# Altium PCB 2018_CARTE_SENSORS5.PCBDOC
Units mil, origin at the board's own origin, x right, y up, seen from the top; angles counter-clockwise.
Board outline 4810 x 1181.1 mil, 4 copper layers (1-TOP, 2-GND, 3-SIGNAL, 4-BOTTOM); 63 components, 65 nets, 229 pads, 60 vias.
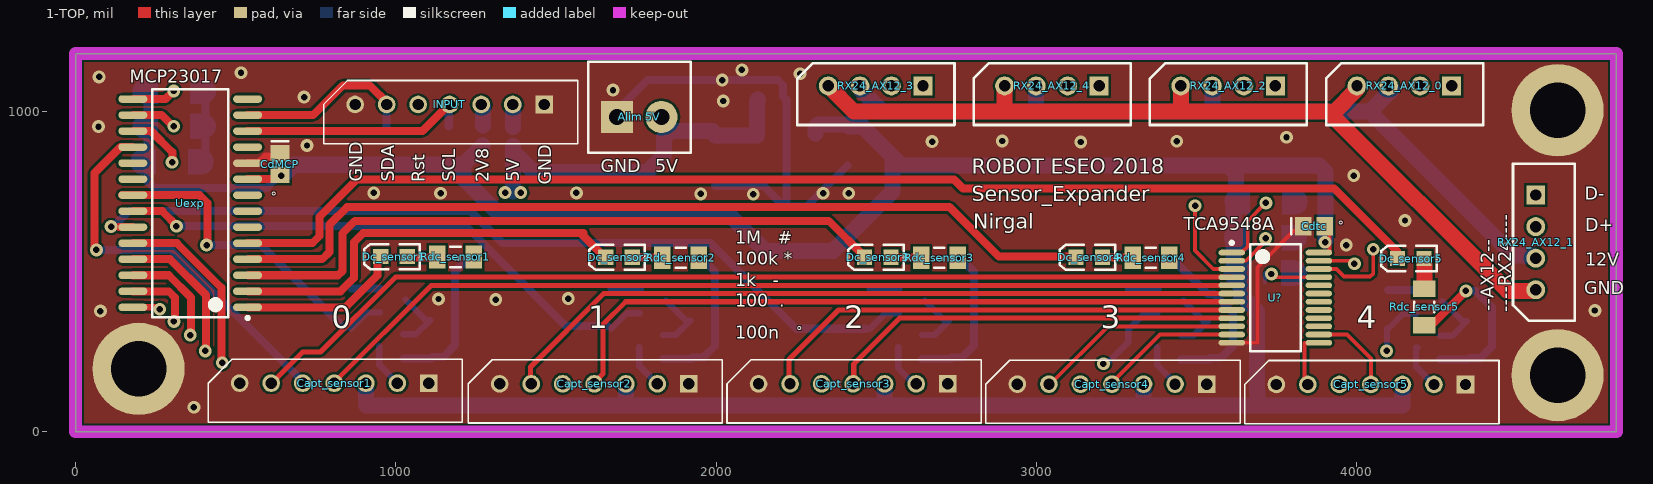
[diagram p0: 1-TOP view]
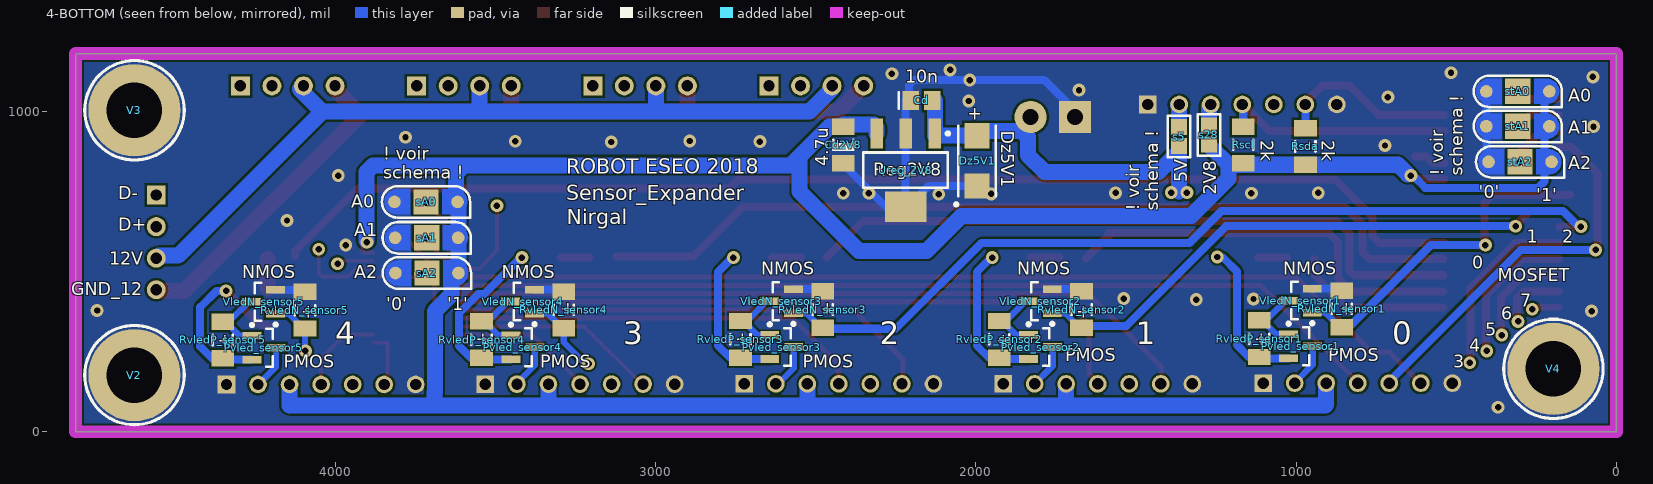
[diagram p1: 4-BOTTOM view, seen from below]
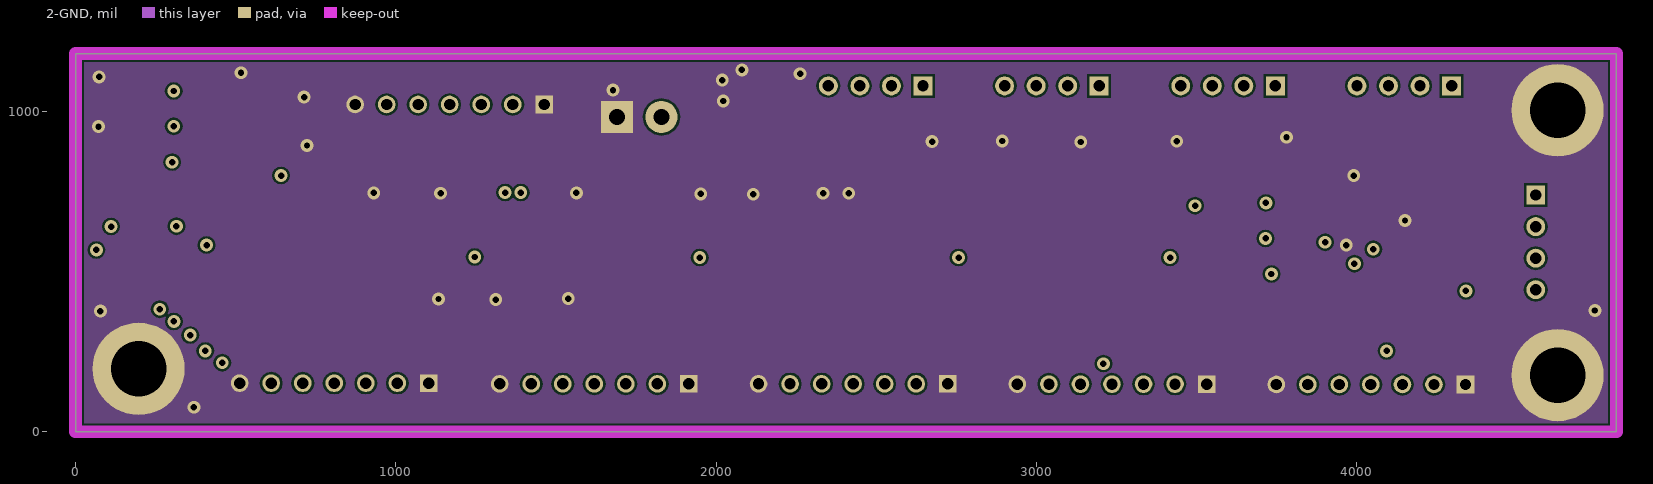
[diagram p2: 2-GND]
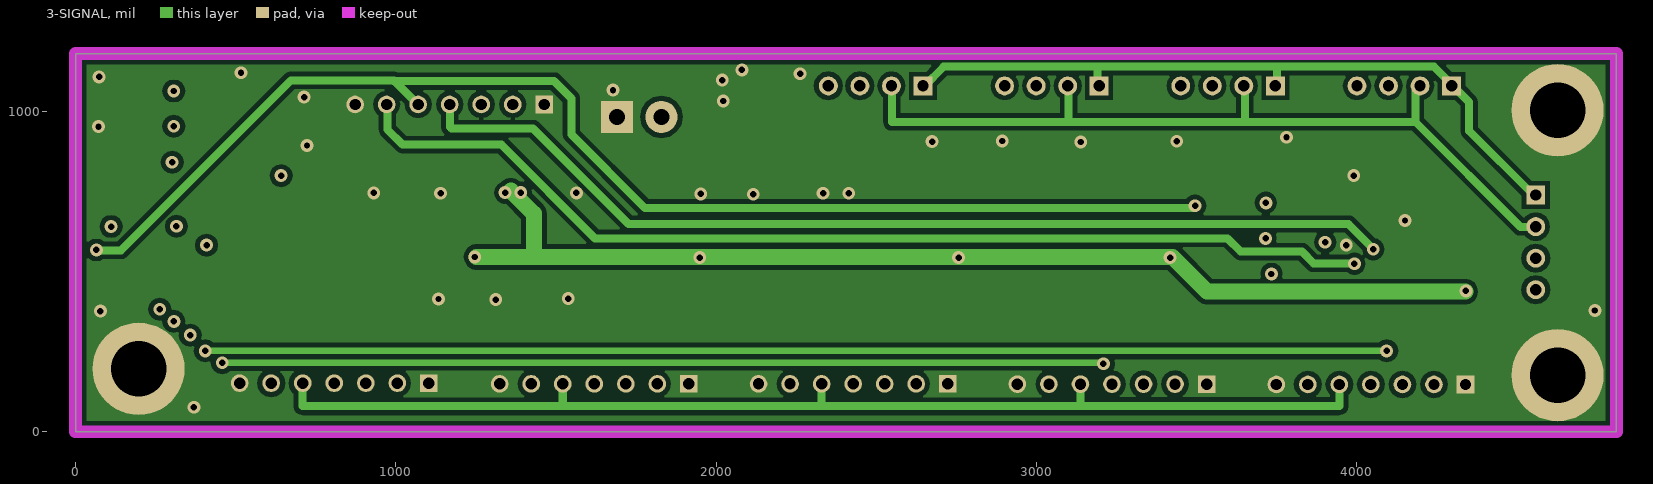
[diagram p3: 3-SIGNAL]
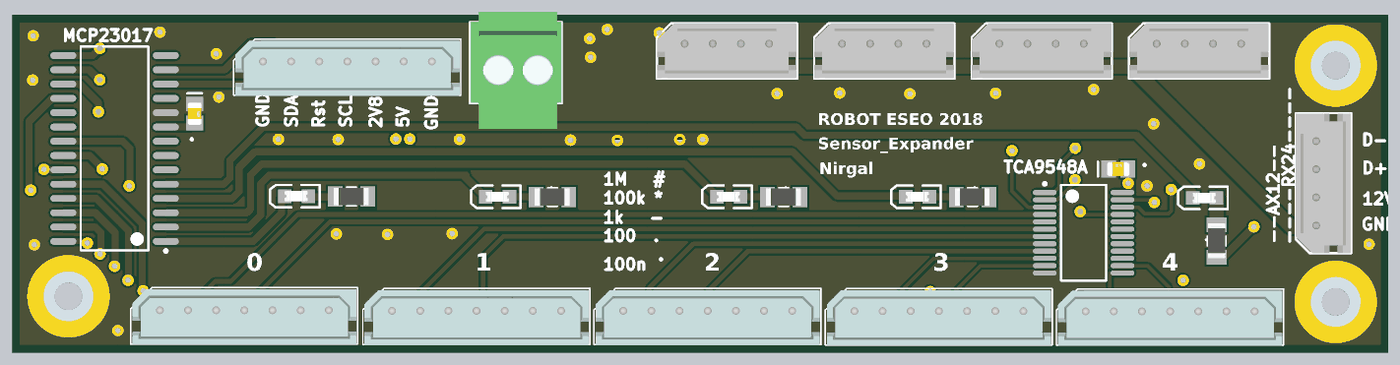
[diagram p4: 3D render of the assembled board from above, using the file's embedded part models]
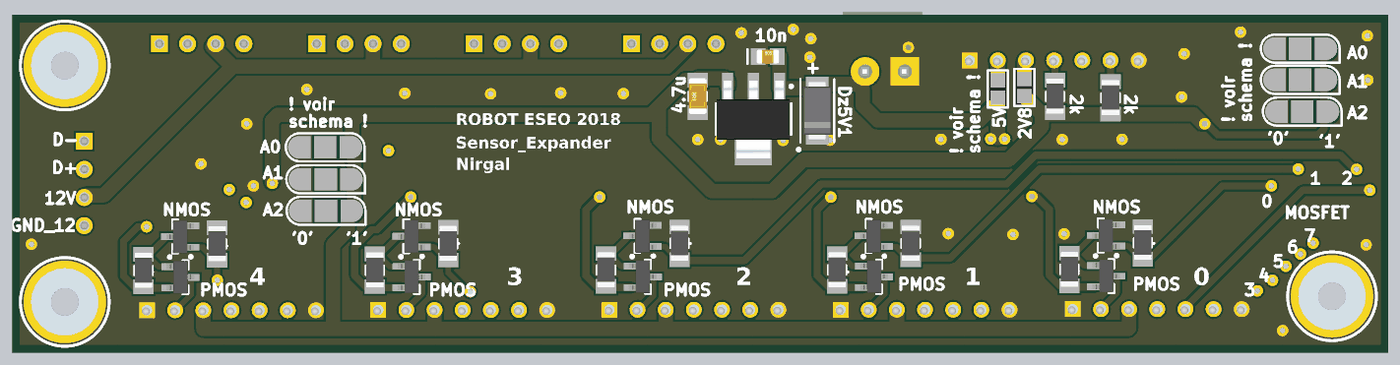
[diagram p5: 3D render of the assembled board from below, using the file's embedded part models]

## Layer stack, top to bottom
Top Solder: solder mask 0.4, Solder Resist, Dk 3.5
1-TOP: signal copper 1.4
Dielectric1: prepreg 12.6, FR-4, Dk 4.8
2-GND: signal copper 1.4
Dielectric2: core 12.6, FR-4, Dk 4.8
3-SIGNAL: signal copper 1.4
Dielectric3: prepreg 12.6, FR-4, Dk 4.8
4-BOTTOM: signal copper 1.4
Bottom Solder: solder mask 0.4, Solder Resist, Dk 3.5

## Board outline
0,0 0,1181.1 4810,1181.1 4810,0

## Design rules (kind name [scope] priority, off if disabled: settings)
Clearance Clearance_1 [InNamedPolygon('4-BOTTOM') Or  InNamedPolygon('2-SIGNAL') Or  InNamedPolygon('2-24V') Or  InNamedPolygon('3-TOP') Or  InNamedPolygon('3-GND')] p1: gap=15
Clearance [All] p2: gap=7
FabricationTestPointUsage TestPointUsage [All] p1: valid=0 allowmultiple=FALSE
FabricationTestpoint Testpoint [All] p1: side=3 testpointundercomponent=TRUE minsize=40 maxsize=100 preferedsize=60 minholesize=0 maxholesize=40 preferedholesize=32 testpointgrid=1 allowsidetop=TRUE allowsidebottom=TRUE usegrid=TRUE gridtolerance=0.01
PlaneClearance [All] p1: clearance=10
PlaneConnect [All] p1: planeconnectstyle=Direct reliefexpansion=25 reliefentries=4 reliefconductorwidth=12 reliefairgap=15
PolygonConnect [All] p1: connectstyle=Direct reliefconductorwidth=10 reliefentries=4 polygonreliefangle="90 Angle" airgapwidth=10
RoomDefinition 2018_CARTE_SENSORS5 [InComponentClass('2018_CARTE_SENSORS5')] p1: confinementstyle=ConfineIn formatcopy=TRUE lockcomponents=FALSE outline 3720,-880 3720,-840 3480,-840 3480,-880
RoomDefinition sensor5 [InComponentClass('sensor5')] p2: confinementstyle=ConfineIn formatcopy=TRUE lockcomponents=FALSE outline 3642.76,593 3642.76,20 4448.76,20 4448.76,593
RoomDefinition sensor4 [InComponentClass('sensor4')] p3: confinementstyle=ConfineIn formatcopy=TRUE lockcomponents=FALSE outline 2834.61,594 2834.61,21 3640.61,21 3640.61,594
RoomDefinition sensor3 [InComponentClass('sensor3')] p4: confinementstyle=ConfineIn formatcopy=TRUE lockcomponents=FALSE outline 2026.61,595 2026.61,22 2832.61,22 2832.61,595
RoomDefinition sensor2 [InComponentClass('sensor2')] p5: confinementstyle=ConfineIn formatcopy=TRUE lockcomponents=FALSE outline 1218.61,595 1218.61,22 2024.61,22 2024.61,595
RoomDefinition sensor1 [InComponentClass('sensor1')] p6: confinementstyle=ConfineIn formatcopy=TRUE lockcomponents=FALSE outline 407,597 407,24 1213,24 1213,597
RoutingLayers RoutingLayers_1 [All] p1: top layer_v5=TRUE mid layer 1_v5=FALSE mid layer 2_v5=FALSE bottom layer_v5=TRUE
RoutingLayers [All] p2: top layer_v5=TRUE mid layer 1_v5=FALSE mid layer 2_v5=FALSE bottom layer_v5=TRUE
RoutingVias [All] p1: holewidth=28 width=50 viastyle="Through Hole" minholewidth=28 minwidth=50 maxholewidth=28 maxwidth=50
SilkToSolderMaskClearance SilkscreenOverComponentPads [IsPad] p1: minsilkscreentomaskgap=10 clearancetoexposedcopper=TRUE
SolderMaskExpansion [All] p1: expansion=0
Width [All] p1: maxlimit=300 minlimit=5 preferedwidth=20
23 further rules are at their usual default settings.

## Classes and differential pairs
channel class sensor: sensor1 sensor2 sensor3 sensor4 sensor5 sensor6 sensor7 sensor8
net class SDA[1..5]: SDA1 SDA2 SDA3 SDA4 SDA5 SDA6 SDA7 SDA8
net class SCL[1..5]: SCL1 SCL2 SCL3 SCL4 SCL5 SCL6 SCL7 SCL8
net class MOSLED[1..5]: MOSLED1 MOSLED2 MOSLED3 MOSLED4 MOSLED5 MOSLED6 MOSLED7 MOSLED8
net class LED[1..5]: LED1 LED2 LED3 LED4 LED5 LED6 LED7 LED8
component class sensor5: Capt_sensor5 Dc_sensor5 Pvled_sensor5 Rdc_sensor5 RvledN_sensor5 RvledP_sensor5 VledN_sensor5
component class sensor4: Capt_sensor4 Dc_sensor4 Pvled_sensor4 Rdc_sensor4 RvledN_sensor4 RvledP_sensor4 VledN_sensor4
component class sensor3: Capt_sensor3 Dc_sensor3 Pvled_sensor3 Rdc_sensor3 RvledN_sensor3 RvledP_sensor3 VledN_sensor3
component class sensor2: Capt_sensor2 Dc_sensor2 Pvled_sensor2 Rdc_sensor2 RvledN_sensor2 RvledP_sensor2 VledN_sensor2
component class sensor1: Capt_sensor1 Dc_sensor1 Pvled_sensor1 Rdc_sensor1 RvledN_sensor1 RvledP_sensor1 VledN_sensor1
component class 2018_CARTE_SENSORS5: "Alim 5V" Cd Cd2V8 CdMCP Cdtc Dz5V1 INPUT Rscl Rsda RX24_AX12_0 RX24_AX12_1 RX24_AX12_2 RX24_AX12_3 RX24_AX12_4 s5 s28 sA0 sA1 sA2 stA0 stA1 stA2 U? Uexp Ureg_2V8 V2 V3 V4

## Components (designator, comment, footprint, x,y, rotation, side; value= is the part's Value field where it differs from the comment)
"Alim 5V" "BORNIER_2V_3.5MM" BORNIER_2V_3.5MM 1691,983 r0 top
Capt_sensor1 "BARRETTE7" MOLEX7_2.50MM 807.66,152 r0 top (schematic designator Capt)
Capt_sensor2 "BARRETTE7" MOLEX7_2.50MM 1619.28,150 r0 top (schematic designator Capt)
Capt_sensor3 "BARRETTE7" MOLEX7_2.50MM 2427.28,150 r0 top (schematic designator Capt)
Capt_sensor4 "BARRETTE7" MOLEX7_2.50MM 3235.28,149 r0 top (schematic designator Capt)
Capt_sensor5 "BARRETTE7" MOLEX7_2.50MM 4043.42,148 r0 top (schematic designator Capt)
Cd "10nF" C0805_N 2169,1035 r180 bottom
Cd2V8 "4.7u" C1206_N 2414,896 r90 bottom
CdMCP "100nF" C0805_N 638,836 r270 top
Cdtc "100nF" C0805_N 3866,642 r0 top
Dc_sensor1 "LED" LED_0805 994,547 r180 top (schematic designator Dc)
Dc_sensor2 "LED" LED_0805 1696.61,545 r180 top (schematic designator Dc)
Dc_sensor3 "LED" LED_0805 2504.61,545 r180 top (schematic designator Dc)
Dc_sensor4 "LED" LED_0805 3164.61,545 r180 top (schematic designator Dc)
Dc_sensor5 "LED" LED_0805 4167.76,541 r180 top (schematic designator Dc)
Dz5V1 "Diode Zener" "SMA Diode" 1996,846 r90 bottom
INPUT "BARRETTE7" MOLEX7_2.50MM 1168,1022 r0 top
Pvled_sensor1 "MOSP" SOT23-3N 986,267 r180 bottom (schematic designator Pvled)
Pvled_sensor2 "MOSP" SOT23-3N 1797.61,265 r180 bottom (schematic designator Pvled)
Pvled_sensor3 "MOSP" SOT23-3N 2605.61,265 r180 bottom (schematic designator Pvled)
Pvled_sensor4 "MOSP" SOT23-3N 3413.61,264 r180 bottom (schematic designator Pvled)
Pvled_sensor5 "MOSP" SOT23-3N 4221.76,263 r180 bottom (schematic designator Pvled)
Rdc_sensor1 "1k" R1206_N 1186,546 r180 top (schematic designator Rdc)
Rdc_sensor2 "1k" R1206_N 1888.61,544 r180 top (schematic designator Rdc)
Rdc_sensor3 "1k" R1206_N 2696.61,544 r180 top (schematic designator Rdc)
Rdc_sensor4 "1k" R1206_N 3356.61,544 r180 top (schematic designator Rdc)
Rdc_sensor5 "1k" R1206_N 4210,390 r90 top (schematic designator Rdc)
Rscl "2k" R1206_N 1165,896 r90 bottom
Rsda "2k" R1206_N 971,891 r90 bottom
RvledN_sensor1 "10k" R1206_N 858,384 r90 bottom (schematic designator RvledN)
RvledN_sensor2 "10k" R1206_N 1669.61,382 r90 bottom (schematic designator RvledN)
RvledN_sensor3 "10k" R1206_N 2477.61,382 r90 bottom (schematic designator RvledN)
RvledN_sensor4 "10k" R1206_N 3285.61,381 r90 bottom (schematic designator RvledN)
RvledN_sensor5 "10k" R1206_N 4093.76,380 r90 bottom (schematic designator RvledN)
RvledP_sensor1 "10k" R1206_N 1115,291 r90 bottom (schematic designator RvledP)
RvledP_sensor2 "10k" R1206_N 1926.61,289 r90 bottom (schematic designator RvledP)
RvledP_sensor3 "10k" R1206_N 2734.61,289 r90 bottom (schematic designator RvledP)
RvledP_sensor4 "10k" R1206_N 3542.61,288 r90 bottom (schematic designator RvledP)
RvledP_sensor5 "10k" R1206_N 4350.76,287 r90 bottom (schematic designator RvledP)
RX24_AX12_0 "MOLEX 22-03-5045" MOLEX4_2.5MM 4000,1080 r0 top
RX24_AX12_1 "MOLEX 22-03-5045" MOLEX4_2.5MM 4558,443.98 r90 top
RX24_AX12_2 "MOLEX 22-03-5045" MOLEX4_2.5MM 3450,1080 r0 top
RX24_AX12_3 "MOLEX 22-03-5045" MOLEX4_2.5MM 2350,1080 r0 top
RX24_AX12_4 "MOLEX 22-03-5045" MOLEX4_2.5MM 2900,1080 r0 top
s5 "Goutte Strap_2" "Goutte Strap_2 Pads_Clearance 0.254mm" 1365,892 r90 bottom
s28 "Goutte Strap_2" "Goutte Strap_2 Pads_Clearance 0.254mm" 1272,897 r90 bottom
sA0 "Goutte Strap_3" "Goutte Strap_3 PADS" 3716,718 r0 bottom
sA1 "Goutte Strap_3" "Goutte Strap_3 PADS" 3714,606 r0 bottom
sA2 "Goutte Strap_3" "Goutte Strap_3 PADS" 3713,496 r0 bottom
stA0 "Goutte Strap_3" "Goutte Strap_3 PADS" 308,1063 r0 bottom
stA1 "Goutte Strap_3" "Goutte Strap_3 PADS" 308,954 r0 bottom
stA2 "Goutte Strap_3" "Goutte Strap_3 PADS" 301,843 r0 bottom
U? "TCA9548A" DB24_N 3745,419 r0 top
Uexp "MCP23017-E/SO" SOIC-SO28_N 358,714 r180 top
Ureg_2V8 "TLV1117LV28DCYR" SOT223-4N 2219,817 r270 bottom
V2 "Entretoise WURTH CMS" ENTRETOISE_CMS 4625.98,177.17 r180 bottom
V3 "Entretoise WURTH CMS" ENTRETOISE_CMS 4625.98,1003.94 r180 bottom
V4 "Entretoise WURTH CMS" ENTRETOISE_CMS 196.85,196.85 r180 bottom
VledN_sensor1 "MOSN" SOT23-3N 987,410 r0 bottom (schematic designator VledN)
VledN_sensor2 "MOSN" SOT23-3N 1798.61,408 r0 bottom (schematic designator VledN)
VledN_sensor3 "MOSN" SOT23-3N 2606.61,408 r0 bottom (schematic designator VledN)
VledN_sensor4 "MOSN" SOT23-3N 3414.61,407 r0 bottom (schematic designator VledN)
VledN_sensor5 "MOSN" SOT23-3N 4222.76,406 r0 bottom (schematic designator VledN)

## Footprints (in the part's own frame and the unit in brackets; to place one, negate y for a bottom-side part, rotate by r counter-clockwise, add the part's x,y. Pads: shape width x height; smd on the part's side, far side on the other; paste and mask are expansions set on the pad)
BORNIER_2V_3.5MM [mm]
  rect 2.54x2.54 hole 1.25: 1(-0.025,0)
  round 2.54 hole 1.25: 2(3.5,0)
  silkscreen extent -2.31,-2.82 5.84,4.39, body extent -2.27,-5.08 5.83,5.32, height 21.81
C0805_N [mm] "Chip Capacitor, Body 2.0x1.3mm, IPC Medium Density"
  rect 1.3x1.5 smd: 1(-0.85,0) 2(0.85,0)
  silkscreen extent -1.8,-0.65 -1.8,0.65, body extent -0.99,-0.63 1.01,0.63, height 0.8
C1206_N [mm] "Chip Capacitor, Body 3.2x1.6mm, IPC Medium Density"
  rect 1.3x1.8 smd: 1(-1.45,0) 2(1.45,0)
  silkscreen extent -0.4,-0.8 0.4,0.8, body extent -1.57,-0.81 1.63,0.79, height 1.02
DB24_N [mm] "SOP, 24-Leads, Body 8.2x5.3mm, Pitch 0.65mm, IPC Medium Density"
  oval 2.1x0.45 smd: 1(-3.45,3.575) 2(-3.45,2.925) 3(-3.45,2.275) 4(-3.45,1.625) 5(-3.45,0.975) 6(-3.45,0.325) 7(-3.45,-0.325) 8(-3.45,-0.975) 9(-3.45,-1.625) 10(-3.45,-2.275) 11(-3.45,-2.925) 12(-3.45,-3.575) 13(3.45,-3.575) 14(3.45,-2.925) 15(3.45,-2.275) 16(3.45,-1.625) 17(3.45,-0.975) 18(3.45,-0.325) 19(3.45,0.325) 20(3.45,0.975) 21(3.45,1.625) 22(3.45,2.275) 23(3.45,2.925) 24(3.45,3.575)
  silkscreen extent -3.57,-4.25 2,4.47, body extent -2.8,-4.25 2.8,4.25, height 2
ENTRETOISE_CMS [mil] "Entretoise CMS Wurth trou 4.4mm"
  round 288 hole 173.23: 1(0,0)
  silkscreen extent -155,-155 155,155, body extent -118,-118 118,117, height 118
"Goutte Strap_2 Pads_Clearance 0.254mm" [mil] "Goutte Strap_2 Pads_Clearance 0.254mm"
  rect 50x50 smd mask+7.87: 1(0,0) 2(60,0)
  silkscreen extent -35,-35 95,35
"Goutte Strap_3 PADS" [mm] "3 Pads CMS Goutte Strap"
  round 1 smd: 1(-2.5,0) 3(2.5,0)
  rect 2x2 smd: 2(0,0)
  1-TOP region: -1.286,-1 -2.286,-1 -2.669,-0.924 -2.993,-0.707 -3.21,-0.383 -3.286,0 -3.286,0 -3.21,0.383 -2.993,0.707 -2.669,0.924 -2.286,1 -2.286,1 -1.286,1
  1-TOP region: 1.289,1 2.289,1 2.672,0.924 2.996,0.707 3.213,0.383 3.289,0 3.289,0 3.213,-0.383 2.996,-0.707 2.672,-0.924 2.289,-1 2.289,-1 1.289,-1
  silkscreen extent -3.5,-1.25 3.5,1.25
LED_0805 [mm] "SM LED; 2 Flat Leads"
  rect 1.2x1.2 smd: 1(-1.05,0) 2(1.05,0)
  silkscreen extent -2.05,-1 2.35,1, body extent -1.05,-0.64 1.06,0.64, height 1.2
MOLEX4_2.5MM [mm] "Ref Molex : 22-03-5045 - 4 voies - 2.5mm"
  rect 1.5x1.5 hole 0.9: 1(7.5,0)
  round 1.5 hole 0.9: 2(5,0) 3(2.5,0) 4(0,0)
  silkscreen extent -2.45,-3.1 10,1.8, body extent -2.44,-3.07 9.96,1.83, height 5.92
MOLEX7_2.50MM [mm] "7 pins, straight"
  rect 1.4x1.4 hole 0.9: 1(7.5,0)
  round 1.4 hole 0.9: 2(5,0) 3(2.5,0) 4(0,0) 5(-2.5,0) 6(-5,0) 7(-7.5,0)
  silkscreen extent -10,-3.1 10.16,1.9, body extent -9.85,-3.15 10.05,1.75, height 5.95
R1206_N [mm] "Chip Resistor, Body 3.2x1.6mm, IPC Medium Density"
  rect 1.3x1.8 smd: 1(-1.45,0) 2(1.45,0)
  silkscreen extent -0.4,-0.8 0.4,0.8, body extent -1.68,-0.87 1.68,0.87, height 0.71
"SMA Diode" [mm] "Case 403D-02"
  rect 2x2 smd: 1(-2,0) 2(2,0)
  silkscreen extent -3.57,-1.5 2.8,1.78, body extent -2.8,-1.46 2.79,1.46, height 2.41
SOIC-SO28_N [mm] "SOIC, 28-Leads, Body 17.9x7.5mm, Pitch 1.27mm, IPC Medium Density"
  oval 2.3x0.6 smd: 1(-4.55,8.255) 2(-4.55,6.985) 3(-4.55,5.715) 4(-4.55,4.445) 5(-4.55,3.175) 6(-4.55,1.905) 7(-4.55,0.635) 8(-4.55,-0.635) 9(-4.55,-1.905) 10(-4.55,-3.175) 11(-4.55,-4.445) 12(-4.55,-5.715) 13(-4.55,-6.985) 14(-4.55,-8.255) 15(4.55,-8.255) 16(4.55,-6.985) 17(4.55,-5.715) 18(4.55,-4.445) 19(4.55,-3.175) 20(4.55,-1.905) 21(4.55,-0.635) 22(4.55,0.635) 23(4.55,1.905) 24(4.55,3.175) 25(4.55,4.445) 26(4.55,5.715) 27(4.55,6.985) 28(4.55,8.255)
  silkscreen extent -4.67,-9.05 3,9.23, body extent -3.8,-9.05 3.8,9.05, height 2.65
SOT23-3N [mm] "SOT23, 3-Leads, Body 2.9x1.3mm, Pitch 0.95mm, Lead Span 2.5mm, IPC Medium Density"
  rect 1.5x0.6 smd: 1(-0.95,0.95) 2(-0.95,-0.95) 3(0.95,0)
  silkscreen extent -1.07,-1.5 0.7,1.92, body extent -1.24,-1.5 1.23,1.5, height 1.1
SOT223-4N [mm] "SOT223/SC73, 4-Leads, Body 6.5x3.5mm, Pitch 2.3mm, Lead Span 7mm, IPC Medium Density"
  rect 2.4x1 smd: 1(-2.9,2.3) 2(-2.9,0) 3(-2.9,-2.3)
  rect 2.4x3.3 smd: 4(2.9,0)
  silkscreen extent -3.02,-3.35 1.4,3.47, body extent -3.39,-3.35 3.5,3.35, height 1.8

## Part data
Capt_sensor1 Capt_sensor2 Capt_sensor3 Capt_sensor4 Capt_sensor5 INPUT: "Header, 6-Pin"
Cd CdMCP Cdtc: library part Condensateur, "Capacitor"
Cd2V8: library part Capacitor, "Capacitor"
Dc_sensor1 Dc_sensor2 Dc_sensor3 Dc_sensor4 Dc_sensor5: "Typical LED"
Dz5V1: "Zener Diode"
Pvled_sensor1 Pvled_sensor2 Pvled_sensor3 Pvled_sensor4 Pvled_sensor5: library part "Transistor MOSFET-P", "P-Channel MOSFET"
Rdc_sensor1 Rdc_sensor2 Rdc_sensor3 Rdc_sensor4 Rdc_sensor5 Rscl Rsda RvledN_sensor1 RvledN_sensor2 RvledN_sensor3 RvledN_sensor4 RvledN_sensor5 RvledP_sensor1 RvledP_sensor2 RvledP_sensor3 RvledP_sensor4 RvledP_sensor5: library part Resistor, "Resistor"
RX24_AX12_0 RX24_AX12_1 RX24_AX12_2 RX24_AX12_3 RX24_AX12_4: library part BARRETTE4, "Header, 4-Pin"
U?: library part PCA9548ADB, "8-Channel I2C Switch with Reset, 2.3 to 5.5 V, -40 to 85 degC, 24-pin SSOP (DB), Green (RoHS & no Sb/Br)"
Uexp: "16-Bit I/O Expander with Serial Interface, 28-Pin SOIC, Extended Temperature"
Ureg_2V8: library part MCP1826S-3302E/DB, "1000 mA, Low Voltage, Low Quiescent Current LDO Regulator, 3-Pin SOT-223, Extended Temperature"
V2 V3 V4: "Entretoise Wurth"
VledN_sensor1 VledN_sensor2 VledN_sensor3 VledN_sensor4 VledN_sensor5: library part "Transistor MOSFET-N", "N-Channel MOSFET"

## Via types
v1: diameter 40, hole 20, 1-TOP to 4-BOTTOM, 60 vias

## Nets (pads, with @x,y where several pads share a name; then routed paths per layer and width w, separated by ;. In a path a pad name is that pad's centre, name@x,y a point inside that pad or via, vN(x,y) a via of type N, cw(c..) or ccw(c..) an arc to the next point about the centre after c; other vN are vias at no path point)
2V8: Capt_sensor1.3 Capt_sensor2.3 Capt_sensor3.3 Capt_sensor4.3 Capt_sensor5.3 Cd2V8.2 CdMCP.2 Cdtc.2 Rscl.1 Rsda.1 s28.1 sA0.1 sA1.1 sA2.1 stA0.1 stA1.1 stA2.1 U?.24 Uexp.9 Ureg_2V8.3 | length 9454.8
  1-TOP w12: U?.24 3913.75,559.75 3914,560 Cdtc.2@3914,629
  1-TOP w25: Uexp.9 625,789 CdMCP.2@636,800
  4-BOTTOM w25: 225,1078 225,782 245,762 597,762 v1@632,797
  4-BOTTOM w50: v1@652,804 681.91,833.91 Rsda.1 1210.91,833.91 ; 906.09,85.91 Capt_sensor1.3 ; 908.09,82.91 3333.7,82.91 ; s28.1@1271,894 1210.91,833.91 ; 1717.7,83.91 Capt_sensor2.3 ; Ureg_2V8.3 2309.55,950.55 2318,959 Cd2V8.2@2413,959 ; Cd2V8.2 2456.91,953.09 2578,832 3597,832 ; 2525.7,83.91 Capt_sensor3.3 ; 2550,850 2550,750 2365,565 2153,565 2044,674 1328,674 1210.91,791.09 1210.91,833.91 ; Capt_sensor4.3 3333.7,82.91 ; sA2.1 sA0.1@3614.57,719.57 ; sA0.1@3622,715 3622,807 3597,832 ; 3637,479 3637,428 3688.59,376.41 3688.59,122.92 3689,122.51 3689,87 ; v1@3902,597 3902,811 3881,832 3597,832 ; Capt_sensor5.3 4141.85,82.91 3333.7,82.91
  other v1: 3900.61,592 641.61,800
5V: "Alim 5V.2" Cd.2 Dz5V1.2 Pvled_sensor1.2 Pvled_sensor2.2 Pvled_sensor3.2 Pvled_sensor4.2 Pvled_sensor5.2 Rdc_sensor1.1 Rdc_sensor2.1 Rdc_sensor3.1 Rdc_sensor4.1 Rdc_sensor5.1 RvledP_sensor1.1 RvledP_sensor2.1 RvledP_sensor3.1 RvledP_sensor4.1 RvledP_sensor5.1 s5.1 Ureg_2V8.1 | length 7031.2
  1-TOP w25: Rdc_sensor5.1 4232.91,332.91 v1(4340,440)
  3-SIGNAL w50: v1@1252,546 1431,546 ; v1@1359,753 1431,681 1431,546 ; v1@3424,546 1431,546 ; v1@3426,544 3532,438 v1@4338,438
  4-BOTTOM w25: Pvled_sensor1.2 1108.4,229.6 RvledP_sensor1.1@1110,228 ; RvledP_sensor1.1 1147.91,233.91 1185,271 1185,501 1229,545 v1@1243,545 ; Pvled_sensor2.2 RvledP_sensor2.1@1924.21,227.6 ; RvledP_sensor2.1 1959.53,231.91 1996.61,269 1996.61,499 v1@1951.61,544 ; Pvled_sensor3.2 RvledP_sensor3.1@2732.21,227.6 ; RvledP_sensor3.1 2767.53,231.91 2804.61,269 2804.61,499 v1@2759.61,544 ; v1@3418,546 3534,430 3553,430 3612.61,370.39 3612.61,268 3575.53,230.91 RvledP_sensor4.1 ; Pvled_sensor4.2 RvledP_sensor4.1@3540.21,226.6 ; Pvled_sensor5.2 RvledP_sensor5.1@4348.36,225.6 ; RvledP_sensor5.1 4383.68,229.91 4420.76,267 4420.76,389.24 4370,440 v1@4351.6,440
  4-BOTTOM w50: 1365,750 s5.1@1365,876 ; s5.1 s5.1@1365,876 ; Dz5V1.2 2127.26,924.74 2127.26,1034.26 Cd.2@2131,1038 ; Dz5V1.2@2004,923 1988,939 1856,939 1837,920 1837,864 1785,812 1429,812 s5.1@1365,876
  other v1: 1948.61,544 2756.61,544 3416.61,544 1246,546 1341,747 1390,747
12V: RX24_AX12_0.3 RX24_AX12_1.3 RX24_AX12_2.3 RX24_AX12_3.3 RX24_AX12_4.3 | length 2591.9
  4-BOTTOM w50: RX24_AX12_3.3 2448.43,1071.57 2520,1000 4040,1000 ; 2998.43,1001.57 RX24_AX12_4.3 ; 3548.43,1001.57 RX24_AX12_2.3 ; RX24_AX12_0.3@4100,1070 4110,1070 4040,1000 ; RX24_AX12_1.3@4550,550 4490,550 4040,1000
CAPTRST_sensor1: Capt_sensor1.5 Capt_sensor2.5 Capt_sensor3.5 Capt_sensor4.5 Capt_sensor5.5 INPUT.5 U?.3 Uexp.18 | length 9065.1
  1-TOP w12: v1@3494,705 3494,566 3551.43,508.57 U?.3
  1-TOP w25: v1@59,571 59,808 140,889 Uexp.18
  3-SIGNAL w25: v1@64,567 142,567 672,1097 994,1097 1065.76,1025.24 INPUT.5@1068.24,1025.24 ; Capt_sensor1.5 709.24,80.24 1520.85,80.24 ; 993,1095 1494,1095 1548,1041 1548,928 1777,699 3493,699 v1@3501,707 ; Capt_sensor2.5 1520.85,80.24 ; Capt_sensor3.5 2328.85,80.24 ; Capt_sensor4.5 3136.85,80.24 ; Capt_sensor5.5 3945,80.24 3136.85,80.24 ; 1520.85,80.24 2328.85,80.24 ; 2328.85,80.24 3136.85,80.24
  4-BOTTOM w25: v1(65,568) 299,568 Capt_sensor1.5@712,155
  other v1: 3494.61,706
D+: RX24_AX12_0.2 RX24_AX12_1.2 RX24_AX12_2.2 RX24_AX12_3.2 RX24_AX12_4.2 | length 2614.3
  3-SIGNAL w25: RX24_AX12_3.2@2548,1081 2548,968 3100,968 ; RX24_AX12_4.2@3100,1090 3100,968 ; RX24_AX12_2.2@3650,1080 3650,968 ; RX24_AX12_0.2@4200,1080 4182,1062 4182,968 ; RX24_AX12_1.2@4560,640 4510,640 4182,968 ; 3100,968 3650,968 ; 3650,968 4182,968
D-: RX24_AX12_0.1 RX24_AX12_1.1 RX24_AX12_2.1 RX24_AX12_3.1 RX24_AX12_4.1 | length 2276.1
  3-SIGNAL w25: RX24_AX12_3.1@2648,1068 2648,1078 2710,1140 3190,1140 ; RX24_AX12_4.1@3190,1080 3190,1140 ; RX24_AX12_2.1@3750,1080 3750,1140 ; RX24_AX12_1.1@4550,740 4350,940 4350,1030 4240,1140 3750,1140 ; 3190,1140 3750,1140
GND: "Alim 5V.1" Capt_sensor1.1 Capt_sensor1.7 Capt_sensor2.1 Capt_sensor2.7 Capt_sensor3.1 Capt_sensor3.7 Capt_sensor4.1 Capt_sensor4.7 Capt_sensor5.1 Capt_sensor5.7 Cd2V8.1 Cd.1 CdMCP.1 Cdtc.1 Dz5V1.1 INPUT.1 INPUT.7 RvledN_sensor1.2 RvledN_sensor2.2 RvledN_sensor3.2 RvledN_sensor4.2 RvledN_sensor5.2 sA0.3 sA1.3 sA2.3 stA0.3 stA1.3 stA2.3 U?.12 Uexp.10 Ureg_2V8.2 Ureg_2V8.4 V2.1 V3.1 V4.1 VledN_sensor1.2 VledN_sensor2.2 VledN_sensor3.2 VledN_sensor4.2 VledN_sensor5.2 | length 2767.7
  1-TOP w12: U?.12 3689.75,278.25 3689,279 3689,514 3802,627 Cdtc.1@3819,627
  1-TOP w25: Uexp.10 573,839 593,859 CdMCP.1@629,859
  4-BOTTOM w25: stA2.3@406.43,841.43 stA1.3 stA0.3 ; Capt_sensor1.7@512.39,146.61 Capt_sensor1.7 ; RvledN_sensor1.2@861.4,447.4 VledN_sensor1.2 ; Capt_sensor2.7@1324,144.61 Capt_sensor2.7 ; RvledN_sensor2.2@1673.02,445.4 VledN_sensor2.2 ; 1692,949 1692,1004 1787,1099 2192,1099 2209,1082 2209,1047 2219,1037 Ureg_2V8.2 Ureg_2V8.4 2280.83,702.83 Cd2V8.1@2409,831 ; Dz5V1.1 2147.74,767.26 Ureg_2V8.4@2210,705 ; Capt_sensor3.7@2132,144.61 Capt_sensor3.7 ; RvledN_sensor3.2@2481.02,445.4 VledN_sensor3.2 ; Capt_sensor4.7@2940,143.61 Capt_sensor4.7 ; RvledN_sensor4.2@3289.02,444.4 VledN_sensor4.2 ; Capt_sensor5.7@3748.15,142.61 Capt_sensor5.7 ; RvledN_sensor5.2@4097.16,443.4 VledN_sensor5.2
  other v1: 369.61,77 77.61,377 4742.61,379 1312,413 1133,415 1538,416 3966.61,583 4150,660 2115.61,742 1951.61,743 1139.61,745 2333.61,745 2413.61,745 930.61,746 1563.61,746 3990,800 722.61,894 3137.61,905 2673.61,906 3437.61,907 2892.61,908 3780,920 71.61,953 2021.61,1033 713.61,1045 1677.61,1067 2018.61,1098 73.61,1108 2261.61,1118 516.61,1121 2080,1130
GND_12: RX24_AX12_0.4 RX24_AX12_1.4 RX24_AX12_2.4 RX24_AX12_3.4 RX24_AX12_4.4 | length 2744.1
  1-TOP w50: RX24_AX12_3.4 2430,1000 2900,1000 ; RX24_AX12_4.4 2900,1000 ; RX24_AX12_2.4 3450,1000 ; 3930,1000 4000,1070 RX24_AX12_0.4 ; RX24_AX12_1.4@4560,440 4470,440 3910,1000 3450,1000 ; 2900,1000 3450,1000
I2C_SCL: INPUT.4 Rscl.2 U?.22 Uexp.12 | length 4103.7
  1-TOP w12: U?.22 3936.43,508.57 3960,485 4041,485 4051,495 v1@4051,574
  1-TOP w25: Uexp.12 1083,939 INPUT.4@1166,1022
  3-SIGNAL w25: INPUT.4@1168.24,1024 1168.24,952.24 1173.47,947 1428,947 1726,649 3973,649 v1@4051,571
  4-BOTTOM w25: Rscl.2 INPUT.4@1165,1018
  other v1: 4051,570
I2C_SDA: INPUT.6 Rsda.2 U?.23 Uexp.13 | length 3949.5
  1-TOP w12: U?.23 3978.84,534.16 v1@3990,523
  1-TOP w25: Uexp.13 742,989 835,1082 918,1082 INPUT.6@975,1025
  3-SIGNAL w25: INPUT.6@973.24,1016 973.24,944.24 1020.47,897 1329,897 1622,604 3596,604 3637,563 3828,563 3865,526 v1@3992,526
  4-BOTTOM w25: Rsda.2 INPUT.6@971,1020
  other v1: 3992,525
LED1: Dc_sensor1.2 Uexp.1 | length 495
  1-TOP w25: Uexp.1@540,389 843,389 942,488 Dc_sensor1.2@942,540
LED2: Dc_sensor2.2 Uexp.2 | length 1299.5
  1-TOP w25: Uexp.2@540,439 827,439 869,481 869,592 898,621 1576,621 ; 1586,621 1576,621 ; Dc_sensor2.2@1656,541 1576,621
LED3: Dc_sensor3.2 Uexp.3 | length 2113.2
  1-TOP w25: Uexp.3@540,489 820,489 833,502 833,620 872,659 2351,659 Dc_sensor3.2@2466,544
LED4: Dc_sensor4.2 Uexp.4 | length 2762.1
  1-TOP w25: Uexp.4@540,539 770,539 793,562 793,647 848,702 2728,702 2882,548 Dc_sensor4.2@3121,548
LED5: Dc_sensor5.2 Uexp.5 | length 3813.4
  1-TOP w25: Uexp.5 739,589 761,611 761,671.25 877.75,788 2742,788 2770,760 3929,760 4125,564 Dc_sensor5.2@4125,549
LED6: Uexp.6
LED7: Uexp.7
LED8: Uexp.8
MOSLED1: RvledN_sensor1.1 Uexp.21 VledN_sensor1.1 | length 1052.8
  1-TOP w25: Uexp.21@145,739 Uexp.21 387,739 412,714 v1@412,586
  4-BOTTOM w20: RvledN_sensor1.1@859,323 908.6,372.6 VledN_sensor1.1
  4-BOTTOM w25: v1(409,583) 579,583 RvledN_sensor1.1@838,324
MOSLED2: RvledN_sensor2.1 Uexp.22 VledN_sensor2.1 | length 1744.3
  1-TOP w25: Uexp.22 271,689 v1@320,640
  4-BOTTOM w20: RvledN_sensor2.1@1672.07,322.46 1720.21,370.6 VledN_sensor2.1
  4-BOTTOM w25: v1(315,642) 1219,642 1530,331 RvledN_sensor2.1@1660,331
MOSLED3: RvledN_sensor3.1 Uexp.23 VledN_sensor3.1 | length 2669.8
  1-TOP w25: Uexp.23@136,639 Uexp.23
  4-BOTTOM w20: RvledN_sensor3.1@2480.07,322.46 2528.21,370.6 VledN_sensor3.1
  4-BOTTOM w25: v1@120,643 167,690 1233,690 1333,590 1982,590 2250,322 RvledN_sensor3.1@2466,322
  other v1: 111,641
MOSLED4: RvledN_sensor4.1 Uexp.24 VledN_sensor4.1 | length 3551.9
  1-TOP w25: Uexp.24 316,589 455,450 v1@455,219
  3-SIGNAL w20: v1@465,216 v1@3204,216
  4-BOTTOM w20: v1@3220,214 3285.61,279.61 RvledN_sensor4.1 ; RvledN_sensor4.1@3286.61,320 3336.21,369.6 VledN_sensor4.1
  other v1: 3208.61,213 458,216
MOSLED5: RvledN_sensor5.1 Uexp.25 VledN_sensor5.1 | length 4320.7
  1-TOP w25: Uexp.25 295,539 407,427 v1@407,258
  3-SIGNAL w20: v1(405,253) v1@4095,253
  3-SIGNAL w25: v1@403,258 v1(405,253)
  4-BOTTOM w20: v1@4093.76,252.24 RvledN_sensor5.1 ; RvledN_sensor5.1@4094.76,319 4144.36,368.6 VledN_sensor5.1
  other v1: 4092.61,253
MOSLED6: Uexp.26 | length 329.7
  1-TOP w25: Uexp.26 291,489 360,420 v1@360,300
  other v1: 358,302
MOSLED7: Uexp.27 | length 209
  1-TOP w25: Uexp.27 291,439 310,420 v1@310,350
  other v1: 307,345
MOSLED8: Uexp.28 | length 84.9
  1-TOP w20: Uexp.28 251,389 v1@260,380
  other v1: 263,383
NetCapt_sensor1_2: Capt_sensor1.2 Pvled_sensor1.3 | length 130.3
  4-BOTTOM w20: Pvled_sensor1.3 948.6,209.4 Capt_sensor1.2@1000,158
NetCapt_sensor2_2: Capt_sensor2.2 Pvled_sensor2.3 | length 146.6
  4-BOTTOM w20: Pvled_sensor2.3 1760.21,205.79 Capt_sensor2.2@1822,144
NetCapt_sensor3_2: Capt_sensor3.2 Pvled_sensor3.3 | length 139.5
  4-BOTTOM w20: Pvled_sensor3.3 2568.21,198.79 Capt_sensor3.2@2620,147
NetCapt_sensor4_2: Capt_sensor4.2 Pvled_sensor4.3 | length 133.7
  4-BOTTOM w20: Pvled_sensor4.3 3376.21,207.79 Capt_sensor4.2@3431,153
NetCapt_sensor5_2: Capt_sensor5.2 Pvled_sensor5.3 | length 136.6
  4-BOTTOM w20: Pvled_sensor5.3 4184.36,203.64 Capt_sensor5.2@4237,151 ; Pvled_sensor5.3@4187,261 Pvled_sensor5.3@4189,263
NetDc_sensor1_1: Dc_sensor1.1 Rdc_sensor1.2 | length 90.7
  1-TOP w25: Dc_sensor1.1@1028,544 Rdc_sensor1.2@1118.66,544
NetDc_sensor2_1: Dc_sensor2.1 Rdc_sensor2.2 | length 90.7
  1-TOP w25: Dc_sensor2.1 Rdc_sensor2.2@1828.61,545
NetDc_sensor3_1: Dc_sensor3.1 Rdc_sensor3.2 | length 90.7
  1-TOP w25: Dc_sensor3.1 Rdc_sensor3.2@2636.61,545
NetDc_sensor4_1: Dc_sensor4.1 Rdc_sensor4.2 | length 90.7
  1-TOP w25: Dc_sensor4.1 Rdc_sensor4.2@3296.61,545
NetDc_sensor5_1: Dc_sensor5.1 Rdc_sensor5.2 | length 92.9
  1-TOP w50: Rdc_sensor5.2 Dc_sensor5.1@4210,540
NetINPUT_2: INPUT.2 s5.2 | length 70.7
  4-BOTTOM w50: s5.2 1365,1017 INPUT.2@1369,1021
NetINPUT_3: INPUT.3 s28.2 | length 67.5
  4-BOTTOM w50: INPUT.3@1266,1022 1272,1016 s28.2
NetPvled_sensor1_1: Pvled_sensor1.1 RvledP_sensor1.2 VledN_sensor1.3 | length 204.2
  4-BOTTOM w20: Pvled_sensor1.1 1062.4,304.4 1107,349 1094,349 VledN_sensor1.3@1031,412
NetPvled_sensor2_1: Pvled_sensor2.1 RvledP_sensor2.2 VledN_sensor2.3 | length 204.2
  4-BOTTOM w20: Pvled_sensor2.1 1874.02,302.4 1918.61,347 1905.61,347 VledN_sensor2.3@1842.61,410
NetPvled_sensor3_1: Pvled_sensor3.1 RvledP_sensor3.2 VledN_sensor3.3 | length 204.2
  4-BOTTOM w20: Pvled_sensor3.1 2682.02,302.4 2726.61,347 2713.61,347 VledN_sensor3.3@2650.61,410
NetPvled_sensor4_1: Pvled_sensor4.1 RvledP_sensor4.2 VledN_sensor4.3 | length 204.2
  4-BOTTOM w20: Pvled_sensor4.1 3490.02,301.4 3534.61,346 3521.61,346 VledN_sensor4.3@3458.61,409
NetPvled_sensor5_1: Pvled_sensor5.1 RvledP_sensor5.2 VledN_sensor5.3 | length 204.2
  4-BOTTOM w20: Pvled_sensor5.1 4298.17,300.4 4342.76,345 4329.76,345 VledN_sensor5.3@4266.76,408
NetsA0_2: sA0.2 U?.1 | length 216
  1-TOP w12: U?.1 3639.75,559.75 3659,579 3659,658 v1@3715,714
  other v1: 3715.61,715
NetsA1_2: sA1.2 U?.2 | length 140.9
  1-TOP w12: U?.2 3653.16,534.16 3716,597 v1@3716,605
  other v1: 3714.61,604
NetsA2_2: sA2.2 U?.21 | length 175.9
  1-TOP w12: v1@3732.98,482.98 U?.21
  4-BOTTOM w12: sA2.2@3713,468 sA2.2
  other v1: 3733,493
NetstA0_2: stA0.2 Uexp.15 | length 134.7
  1-TOP w25: Uexp.15 281,1039 v1@304,1062
  other v1: 306.61,1064
NetstA1_2: stA1.2 Uexp.16 | length 143.9
  1-TOP w25: Uexp.16 269,989 v1@307,951
  other v1: 306.61,954
NetstA2_2: stA2.2 Uexp.17 | length 180.5
  1-TOP w25: Uexp.17 236,939 302,873 v1@302,843
  other v1: 301.61,842
SCL1: Capt_sensor1.4 U?.5 | length 2924.3
  1-TOP w16: Capt_sensor1.4@809.5,156.5 1110.39,457.39 U?.5
SCL2: Capt_sensor2.4 U?.7 | length 2182
  1-TOP w16: Capt_sensor2.4@1621,156 1646,181 1646,335 1717.2,406.2 U?.7
SCL3: Capt_sensor3.4 U?.9 | length 1299.4
  1-TOP w16: Capt_sensor3.4@2429,152 2429,212 2572.02,355.02 U?.9
SCL4: Capt_sensor4.4 U?.11 | length 436.2
  1-TOP w12: Capt_sensor4.4@3235,154 3384.84,303.84 U?.11
SCL5: Capt_sensor5.4 U?.14 | length 274.2
  1-TOP w12: U?.14 3969.16,303.84 4044,229 Capt_sensor5.4@4044,149
SCL6: U?.16
SCL7: U?.18
SCL8: U?.20
SDA1: Capt_sensor1.6 U?.4 | length 3134.3
  1-TOP w16: Capt_sensor1.6@612,152 709,249 765,249 998.98,482.98 U?.4
SDA2: Capt_sensor2.6 U?.6 | length 2329.9
  1-TOP w16: Capt_sensor2.6@1420,157 1420,203 1648.8,431.8 U?.6
SDA3: Capt_sensor3.6 U?.8 | length 1519.2
  1-TOP w16: Capt_sensor3.6@2227,153 2227,226 2381.61,380.61 U?.8
SDA4: Capt_sensor4.6 U?.10 | length 639.1
  1-TOP w12: Capt_sensor4.6@3044,151 3222.43,329.43 U?.10
SDA5: Capt_sensor5.6 U?.13 | length 185.8
  1-TOP w12: Capt_sensor5.6@3841,139 3836.25,143.75 3836.25,278.25 U?.13
SDA6: U?.15
SDA7: U?.17
SDA8: U?.19
pads on no net: Uexp.11 Uexp.14 Uexp.19 Uexp.20

## Polygon pours and split planes (outlines as drawn)
GND on 3-SIGNAL "3-GND" (solid, pour order 5): 4810,1183 4810,0 5.98,2.39 0,1183
GND on 2-GND "2-GND" (solid, pour order 6): 4810,1176 4810,0 5.98,2.38 0,1176
GND on 1-TOP "1-GND" (solid, pour order 7): 4810,1186 4810,0 5.98,2.4 0,1186
GND on 4-BOTTOM "4-BOTTOM-GND" (solid, pour order 8): 4820,1176 4820,0 6,2.38 0,1176

## Keep-outs
Keep-Out Layer:
  the board outline again, w39.37

## Silkscreen, mask and mechanical layers (free items; w line width, h text height)
Top Overlay:
  text "MCP23017" at 170,1090 h40
  text "GND" at 1640,810 h40
  text "5V" at 1810,810 h40
  text "ROBOT ESEO 2018" at 2798,790 h80
  text "GND" at 895,781 h40 r90
  text "SDA" at 995,781 h40 r90
  text "SCL" at 1185,781 h40 r90
  text "5V" at 1385,781 h40 r90
  text "Rst" at 1090,780 h40 r90
  text "2V8" at 1290,780 h40 r90
  text "GND" at 1485,771 h40 r90
  text "D-" at 4711,725 h40
  text "°" at 610,720 h30
  text "Sensor_Expander" at 2798,705 h80
  text "TCA9548A" at 3460,630 h40
  text "°" at 3940,630 h30
  text "D+" at 4712,627 h40
  text "Nirgal" at 2802,618 h80
  text "1M   #" at 2060,588 h40
  text "-" at 1210,530 h40 r90
  text "-" at 1900,530 h40 r90
  text "-" at 2720,530 h40 r90
  text "-" at 3380,530 h40 r90
  text "100k *" at 2060,522 h40
  text "12V" at 4713,519 h40
  text "1k   -" at 2060,454 h40
  text "GND" at 4710,430 h40
  text "-" at 4220,410 h40 r180
  text "100  ." at 2060,390 h40
  text "--AX12--" at 4427,376 h40 r90
  text "----RX24----" at 4481,373 h40 r90
  text "0" at 800,300 h120
  text "1" at 1600,300 h120
  text "°" at 2250,300 h30
  text "2" at 2400,300 h120
  text "3" at 3200,300 h120
  text "4" at 4000,300 h120
  text "100n" at 2060,290 h40
Bottom Overlay:
  text "10n" at 2220,1090 h40
  text "A0" at 150,1030 h40
  text "+" at 1980,1010 h40 r180
  text "Dz5V1" at 1920,940 h40 r90
  text "A1" at 150,930 h40
  text "2k" at 920,910 h40 r90
  text "2k" at 1110,910 h40 r90
  text "! voir" at 3850,850 h40
  text "4.7u" at 2460,830 h40 r270
  text "A2" at 150,820 h40
  text "schema !" at 480,800 h40 r270
  text "! voir" at 540,800 h40 r270
  text "Reg2V8" at 2320,800 h40
  text "ROBOT ESEO 2018" at 3278,790 h80
  text "schema !" at 3850,790 h40
  text "5V" at 1340,780 h40 r270
  text "2V8" at 1250,740 h40 r270
  text "'0'" at 430,730 h40
  text "D-" at 4676,726 h40
  text "'1'" at 250,720 h40
  text "Sensor_Expander" at 3278,708 h80
  text "A0" at 3950,700 h40
  text "schema !" at 1430,690 h40 r270
  text "! voir" at 1490,690 h40 r270
  text "Nirgal" at 3277,633 h80
  text "D+" at 4677,628 h40
  text "A1" at 3940,610 h40
  text "2" at 170,590 h40
  text "1" at 280,590 h40
  text "12V" at 4704,521 h40
  text "0" at 450,510 h40
  text "NMOS" at 1040,490 h40
  text "NMOS" at 1870,490 h40
  text "NMOS" at 2670,490 h40
  text "NMOS" at 3480,480 h40
  text "A2" at 3940,480 h40
  text "NMOS" at 4290,480 h40
  text "MOSFET" at 370,470 h40
  text "GND_12" at 4823,426 h40
  text "7" at 300,390 h40
  text "'1'" at 3650,380 h40
  text "'0'" at 3840,380 h40
  text "+" at 866,366 h40
  text "+" at 2486,366 h40
  text "+" at 3296,366 h40
  text "+" at 1686,356 h40
  text "+" at 4106,356 h40
  text "6" at 360,350 h40
  text "5" at 410,300 h40
  text "+" at 1130,270 h40
  text "+" at 2750,270 h40
  text "+" at 3560,270 h40
  text "+" at 1936,266 h40
  text "+" at 4366,266 h40
  text "4" at 460,250 h40
  text "0" at 700,250 h120
  text "1" at 1500,250 h120
  text "2" at 2300,250 h120
  text "3" at 3100,250 h120
  text "4" at 4000,250 h120
  text "PMOS" at 900,220 h40
  text "PMOS" at 1720,220 h40
  text "3" at 510,200 h40
  text "PMOS" at 2540,200 h40
  text "PMOS" at 3360,200 h40
  text "PMOS" at 4160,200 h40

## Dimensions
4810,0 to 3937.01,0 on Mechanical 15